# EAGLE board Module-WiFi-M0-v0.1 (EAGLE 7.5.0)

Size 100 x 80 mm. Coordinates in mm from the lower left corner, seen from the top.
Outline: 0,0 100,0 100,80 0,80 0,0
Copper layers (1*16): Top 0.035mm / dielectric 1.5mm / Bottom 0.035mm
Design rules "default": minimum track width 10mil, minimum drill 24mil, track to track 8mil, track to pad 8mil, pad to pad 8mil, via to via 8mil, smd to smd 8mil, copper to edge 40mil, drill to drill 8mil, minimum pad ring 10mil, minimum via ring 8mil, stop-mask expansion 4mil, vias tented up to drill 0mil, thermal gap 10mil

## Footprints (pad centres in the part's own frame; a part is rotated, then mirrored left to right if it is on the bottom)
2,15/1,0 = drill 1.016 pad 2.159 octagon: 1 0,0
NIC_10X10.5_CAP = smd 4.5 x 2.5: + 4.5,0; - -4.5,0
0402-CAP = smd 0.85 x 0.9: 1 -0.58,0; 2 0.58,0
0603-CAP = smd 1.1 x 1: 1 -0.85,0; 2 0.85,0
SOD-923 = smd 0.36 x 0.25: A -0.6,0; C 0.6,0
LED_RGB = smd 1.2 x 0.9: 1-RED 1.4,-0.725; 2-CA -1.4,-0.725; 3-BL -1.4,0.725; 4-GR 1.4,0.725
SOD523 = smd 0.7 x 0.5: A 0.7,0; C -0.6,0
1,6/0,9 = drill 0.914 pad 1.6 octagon: 1 0,0
FIDUCIAL-1X2 = smd 1 x 1: 1 0,0
SOIC-8-TIGHT = smd 0.6 x 1.2: 1 -1.905,-2.8; 2 -0.635,-2.8; 3 0.635,-2.8; 4 1.905,-2.8; 5 1.905,2.8; 6 0.635,2.8; 7 -0.635,2.8; 8 -1.905,2.8
SO08-TIGHT = smd 1.2 x 0.6: 1 -2.8,1.905; 2 -2.8,0.635; 3 -2.8,-0.635; 4 -2.8,-1.905; 5 2.8,-1.905; 6 2.8,-0.635; 7 2.8,0.635; 8 2.8,1.905
SOT223 = smd 1.219 x 2.235: 1 -2.311,-3.099; 2 0,-3.099; 3 2.311,-3.099 | smd 3.6 x 2.2: 4 0,3.099
DSS12_P9X2 = smd 0.5 x 0.28: 1 -0.959,1.25; 2 -0.959,0.75; 3 -0.959,0.25; 4 -0.959,-0.25; 5 -0.959,-0.75; 6 -0.959,-1.25; 7 0.959,-1.25; 8 0.959,-0.75; 9 0.959,-0.25; 10 0.959,0.25; 11 0.959,0.75; 12 0.959,1.25 | smd 0.9 x 2: 13 0,0 | drill 0.254 pad 0.508: G1 0,0.406; G2 0,-0.406
DHVQFN16 = smd 0.24 x 0.9: 1 -0.5,1.8; 8 -0.5,-1.8; 9 0.5,-1.8; 16 0.5,1.8 | smd 0.9 x 0.24: 2 -1.3,1.25; 3 -1.3,0.75; 4 -1.3,0.25; 5 -1.3,-0.25; 6 -1.3,-0.75; 7 -1.3,-1.25; 10 1.3,-1.25; 11 1.3,-0.75; 12 1.3,-0.25; 13 1.3,0.25; 14 1.3,0.75; 15 1.3,1.25 | smd 0.9 x 1.9: EPAD 0,0
WT8266 = smd 1.5 x 1: 1 -7.35,4.75; 2 -7.35,3.25; 3 -7.35,1.75; 4 -7.35,0.25; 5 -7.35,-1.25; 6 -7.35,-2.75; 13 8.15,-2.75; 14 8.15,-1.25; 15 8.15,0.25; 16 8.15,1.75; 17 8.15,3.25; 18 8.15,4.75 | smd 1 x 1.5: 7 -3.2,-6.35; 8 -1.7,-6.35; 9 -0.2,-6.35; 10 1.3,-6.35; 11 2.8,-6.35; 12 4.3,-6.35
SPC4078 = drill 0.8 pad 2.184 long: 1 0,0; 2 3,-4.8 | drill 1 pad 2.184 long: 3 6,0
SOT23-6 = smd 0.6 x 0.9: 1 -0.95,-1.15; 2 0,-1.15; 3 0.95,-1.15; 4 0.95,1.15; 5 0,1.15; 6 -0.95,1.15
SOT-23 = smd 1.016 x 1.143: 1 -0.889,-1.016; 2 0.889,-1.016; 3 0,1.016
R0402 = smd 0.7 x 0.9: 1 -0.65,0; 2 0.65,0
R1206 = smd 1.6 x 1.803: 1 -1.422,0; 2 1.422,0
0603-ARV = smd 0.5 x 0.65: 1 -1.2,-0.625; 2 -0.4,-0.625; 3 0.4,-0.625; 4 1.2,-0.625; 5 1.2,0.625; 6 0.4,0.625; 7 -0.4,0.625; 8 -1.2,0.625
ANGLE_SENSOR_MURATA = smd 1.8 x 2: 1 -2.5,-7.7; 2@1 0,-7.7; 2@2 0,6.2; 3 2.5,-7.7 | hole 5.1: 0,0 | hole 1.2: -4.24,-5.51; 4.24,-5.53
TACTILE_SWITCH_TALL = smd 1.55 x 1.3: A1 -3.975,-2.25; A2 3.975,-2.25; B1 -3.975,2.25; B2 3.975,2.25
SMD1,27-2,54 = smd 1.27 x 2.54: 1 0,0
0402-RES = smd 0.85 x 0.9: 1 -0.58,0; 2 0.58,0

## Placement (x,y rotation side)
BATT+  WIREPAD2,15/1,0  [2,15/1,0]  -43.18,48.26 0 top  (outside the outline)
BATT-  WIREPAD2,15/1,0  [2,15/1,0]  -49.53,48.26 0 top  (outside the outline)
C1  100uF  [NIC_10X10.5_CAP]  -62,-55 0 top  (outside the outline)
C2  0.1uF  [0402-CAP]  -101,-102 0 top  (outside the outline)
C3  10uF  [0402-CAP]  -101,-114 0 top  (outside the outline)
C4  100u  [0603-CAP]  -36.83,54.61 0 top  (outside the outline)
C5  0.1uF  [0402-CAP]  -48.26,54.61 0 top  (outside the outline)
C6  0.1uF  [0402-CAP]  -52.07,54.61 0 top  (outside the outline)
C7  10uF  [0402-CAP]  -55.88,54.61 0 top  (outside the outline)
C12  10uF  [0402-CAP]  -19.05,59.69 0 top  (outside the outline)
C13  10uF  [0402-CAP]  -22.86,59.69 0 top  (outside the outline)
C14  0.1uF  [0402-CAP]  -26.67,59.69 0 top  (outside the outline)
C15  10uF  [0402-CAP]  -30.48,59.69 0 top  (outside the outline)
C16  10uF  [0402-CAP]  -34.29,59.69 0 top  (outside the outline)
C17  0.1uF  [0402-CAP]  -38.1,59.69 0 top  (outside the outline)
D1  ESD9X5  [SOD-923]  -33.02,54.61 0 top  (outside the outline)
D3  [LED_RGB]  -43.18,31.75 0 top  (outside the outline)
D4  PMEG3005EB  [SOD523]  -24.13,39.37 0 top  (outside the outline)
D5  PMEG3005EB  [SOD523]  -36.83,39.37 0 top  (outside the outline)
D6  PMEG3005EB  [SOD523]  -49.53,39.37 0 top  (outside the outline)
DTR  WIREPAD1,6/0,9  [1,6/0,9]  -59.69,48.26 0 top  (outside the outline)
FID1  FIDUCIAL1X2  [FIDUCIAL-1X2]  -45.72,58.42 0 top  (outside the outline)
FID2  FIDUCIAL1X2  [FIDUCIAL-1X2]  -48.26,58.42 0 top  (outside the outline)
FID3  FIDUCIAL1X2  [FIDUCIAL-1X2]  -50.8,58.42 0 top  (outside the outline)
FID4  FIDUCIAL1X2  [FIDUCIAL-1X2]  -53.34,58.42 0 top  (outside the outline)
FID5  FIDUCIAL1X2  [FIDUCIAL-1X2]  -55.88,58.42 0 top  (outside the outline)
FID6  FIDUCIAL1X2  [FIDUCIAL-1X2]  -58.42,58.42 0 top  (outside the outline)
FID7  FIDUCIAL1X2  [FIDUCIAL-1X2]  -13.97,62.23 0 top  (outside the outline)
FID8  FIDUCIAL1X2  [FIDUCIAL-1X2]  -16.51,62.23 0 top  (outside the outline)
GND  WIREPAD1,6/0,9  [1,6/0,9]  -54.61,48.26 0 top  (outside the outline)
IC1  BQ2057WSNTR  [SOIC-8-TIGHT]  -29.21,25.4 0 top  (outside the outline)
IC2  [SO08-TIGHT]  -100,-85 0 top  (outside the outline)
IC3  LM1117_3.3VSOT223  [SOT223]  -73,-56 0 top  (outside the outline)
IC4  DRV8835DSSR  [DSS12_P9X2]  -72,-65 0 top  (outside the outline)
IC7  74HC4051  [DHVQFN16]  -15.24,25.4 0 top  (outside the outline)
IC11  WT8266  [WT8266]  -22.86,7.62 0 top  (outside the outline)
J1  [SPC4078]  -50,-7 0 top  (outside the outline)
MOT-N  WIREPAD1,6/0,9  [1,6/0,9]  -102,-111 0 top  (outside the outline)
MOT-P  WIREPAD1,6/0,9  [1,6/0,9]  -102,-107 0 top  (outside the outline)
NC  WIREPAD1,6/0,9  [1,6/0,9]  -30.48,54.61 0 top  (outside the outline)
Q1  IRLTS2242-PMOS  [SOT23-6]  -59,-30 0 top  (outside the outline)
Q2  2N7002-NMOS  [SOT-23]  -39.37,25.4 0 top  (outside the outline)
Q3  IRLTS2242-PMOS  [SOT23-6]  -24.13,33.02 0 top  (outside the outline)
R1  100k  [R0402]  -102,-93 0 top  (outside the outline)
R2  100k  [R0402]  -54.61,39.37 0 top  (outside the outline)
R3  10k  [R0402]  -58.42,44.45 0 top  (outside the outline)
R4  100k  [R0402]  -16.51,44.45 0 top  (outside the outline)
R5  100k  [R0402]  -22.86,44.45 0 top  (outside the outline)
R6  3k  [R0402]  -59,-41 0 top  (outside the outline)
R7  3k  [R0402]  -59,-46 0 top  (outside the outline)
R8  0.02E, 1W  [R1206]  -73,-72 0 top  (outside the outline)
R9  0.5E, 0.5W  [R1206]  -57,-23 0 top  (outside the outline)
R10  3k  [R0402]  -59,-36 0 top  (outside the outline)
R11  30k  [R0402]  -74,-78 0 top  (outside the outline)
R12  330E  [0603-ARV]  -29.21,33.02 0 top  (outside the outline)
R14  30k  [R0402]  -27.94,44.45 0 top  (outside the outline)
R15  3k  [R0402]  -33.02,44.45 0 top  (outside the outline)
R16  3k  [R0402]  -74,-83 0 top  (outside the outline)
R17  DNI  [ANGLE_SENSOR_MURATA]  -87,-76 0 top  (outside the outline)
R18  30k  [R0402]  -93,-88 0 top  (outside the outline)
R19  30k  [R0402]  -102,-98 0 top  (outside the outline)
R20  10k  [R0402]  -43.18,44.45 0 top  (outside the outline)
R22  10k  [R0402]  -48.26,44.45 0 top  (outside the outline)
R23  3k  [R0402]  -53.34,44.45 0 top  (outside the outline)
RXD  WIREPAD1,6/0,9  [1,6/0,9]  -16.51,54.61 0 top  (outside the outline)
S1  On/Off Sw  [TACTILE_SWITCH_TALL]  -52.07,5.08 0 top  (outside the outline)
SNS-1  WIREPADSMD1,27-254  [SMD1,27-2,54]  -105,-112 0 top  (outside the outline)
SNS-2  WIREPADSMD1,27-254  [SMD1,27-2,54]  -109,-112 0 top  (outside the outline)
SNS-3  WIREPADSMD1,27-254  [SMD1,27-2,54]  -113,-112 0 top  (outside the outline)
SNS-4  WIREPADSMD1,27-254  [SMD1,27-2,54]  -117,-112 0 top  (outside the outline)
SNS-5  WIREPADSMD1,27-254  [SMD1,27-2,54]  -121,-112 0 top  (outside the outline)
TR1  10kNTC  [0402-RES]  -41.91,59.69 0 top  (outside the outline)
TXD  WIREPAD1,6/0,9  [1,6/0,9]  -21.59,54.61 0 top  (outside the outline)
VCC  WIREPAD1,6/0,9  [1,6/0,9]  -26.67,54.61 0 top  (outside the outline)

## Library data of the parts
BATT+ BATT- DTR GND MOT-N MOT-P NC RXD SNS-1-SNS-5 TXD VCC = wirepad
C1 = 1_ZeroUI; PROD_ID: CAP-08362
C2 C3 C5-C7 C12-C17 = 1_ZeroUI; PROD_ID: CAP-12416
C4 R12 = SparkFun-Passives
D1 D3 IC2 IC7 IC11 Q1 Q3 R17 TR1 = 1_ZeroUI
D4-D6 = diode
FID1-FID8 = SparkFun-Aesthetics
IC1 = 1_ZeroUI; DATASHEETURL: http://www.ti.com/lit/ds/symlink/bq2057c.pdf
IC3 = 1_ZeroUI; PROD_ID: VREG-08170
IC4 = 1_ZeroUI; MANUFACTURER_PART_NUMBER: drv8835_dss_12; VENDOR: Texas Instruments
J1 = con-jack; OC_FARNELL: unknown; OC_NEWARK: unknown
Q2 = 1_ZeroUI; MPN: 2N7002,215
R1-R11 R14-R16 R18-R20 R22 R23 = rcl
S1 = 1_ZeroUI; PROD_ID: SWCH-11966

## Nets
3.3V: C7.1 C13.1 C14.1 C15.1 D1.C D3.2-CA IC2.8 IC3.2 IC3.4 IC4.12 IC7.16 IC7.EPAD IC11.1 IC11.14 R4.2 R18.1 R20.2 R23.2 VCC.1
12V: C12.1 IC1.3 IC1.8 J1.3 R6.1 R9.1 R10.2
CHG_ON: IC1.5 IC11.7 R5.1
DTR: C17.2 D4.C DTR.1
GND: BATT-.1 C1.- C2.2 C3.2 C4.2 C12.2 C13.2 C14.2 C15.2 C16.2 D1.A GND.1 IC1.6 IC2.4 IC3.1 IC4.11 IC7.6 IC7.7 IC7.8 IC11.6 IC11.10 IC11.18 J1.1 J1.2 Q2.2 R7.2 R8.2 R15.1 R16.1 R17.3 R22.1 S1.B2 TR1.2
LED-G: IC11.16 R12.7
MOT_IN1: IC4.8 IC4.10 IC11.4
MOT_IN2: IC4.7 IC4.9 IC11.17
MOT_IRAW: IC4.6 IC4.13 IC4.G1 IC4.G2 R8.1 R19.2
MOT_ISNS: IC2.1 IC7.14 R11.1
MOT_POS: IC7.13
MUX_COM: IC7.3 IC11.13
MUX_S0: IC7.11 IC11.8
MUX_S1: IC7.10 IC11.2
MUX_S2: IC7.9 IC11.5 R22.2
N$1: R17.2@1 R17.2@2
N$2: IC4.3 IC4.5 MOT-N.1
N$3: IC4.2 IC4.4 MOT-P.1
N$4: IC7.12 SNS-1.1
N$5: IC7.1 SNS-2.1
N$6: D3.1-RED R12.1
N$7: D3.4-GR R12.2
N$8: D3.3-BL R12.3
N$9: D6.C R5.2
N$10: C2.1 IC2.3 R19.1
N$11: IC1.1 Q1.4 R9.2
N$12: IC1.7 Q1.3 R10.1
N$13: IC7.5 SNS-3.1
N$14: C6.1 D5.C R3.1 S1.A2
N$15: C7.2 Q2.1 R1.1
N$16: C5.2 C6.2 D6.A Q2.3 Q3.3 R2.1
N$17: R17.1 R18.2
N$18: IC2.2 R11.2 R16.2
N$19: IC7.2 SNS-4.1
N$20: IC7.4 SNS-5.1
PROGL/LED-B: D4.A IC11.3 R12.6 R23.1
RST: C17.1 IC11.12 R20.1
RXD/LED-R: IC11.9 R12.8 RXD.1
SW_INT: D5.A IC11.15 R1.2 R4.1
TS: IC1.4 R6.2 R7.1 TR1.1
TXD: IC11.11 TXD.1
V_BATT: BATT+.1 C4.1 C5.1 C16.1 IC1.2 Q1.1 Q1.2 Q1.5 Q1.6 Q3.4 R2.2 R3.2 R14.2
VBATT_SENSE: IC7.15 R14.1 R15.2
VDD: C1.+ C3.1 IC3.3 IC4.1 Q3.1 Q3.2 Q3.5 Q3.6

## Tracks (layer width: path | path; a pad name or v marks a point on that pad's centre or on a via)
3.3V  (18 unrouted)
12V  (6 unrouted)
CHG_ON  (2 unrouted)
DTR  (2 unrouted)
GND  (32 unrouted)
LED-G  (1 unrouted)
MOT_IN1  (2 unrouted)
MOT_IN2  (2 unrouted)
MOT_IRAW  (5 unrouted)
MOT_ISNS  (2 unrouted)
MUX_COM  (1 unrouted)
MUX_S0  (1 unrouted)
MUX_S1  (1 unrouted)
MUX_S2  (2 unrouted)
N$1  (1 unrouted)
N$2  (2 unrouted)
N$3  (2 unrouted)
N$4  (1 unrouted)
N$5  (1 unrouted)
N$6  (1 unrouted)
N$7  (1 unrouted)
N$8  (1 unrouted)
N$9  (1 unrouted)
N$10  (2 unrouted)
N$11  (2 unrouted)
N$12  (2 unrouted)
N$13  (1 unrouted)
N$14  (3 unrouted)
N$15  (2 unrouted)
N$16  (5 unrouted)
N$17  (1 unrouted)
N$18  (2 unrouted)
N$19  (1 unrouted)
N$20  (1 unrouted)
PROGL/LED-B  (3 unrouted)
RST  (2 unrouted)
RXD/LED-R  (2 unrouted)
SW_INT  (3 unrouted)
TS  (3 unrouted)
TXD  (1 unrouted)
V_BATT  (12 unrouted)
VBATT_SENSE  (2 unrouted)
VDD  (7 unrouted)